# Altium PCB MB1364.PcbDoc (part 3 of 3)
Units mm, origin at the board's own origin, x right, y up, seen from the top; angles counter-clockwise.
Board outline 70 x 133.34 mm, 6 copper layers (Top Layer, Signal Layer 1, Signal Layer 2, Signal Layer 3, Signal Layer 4, Bottom Layer), stack 1.57 mm thick; 66 components, 167 nets, 440 pads, 46 vias.
Unrouted connection lines stored in the file: 1.
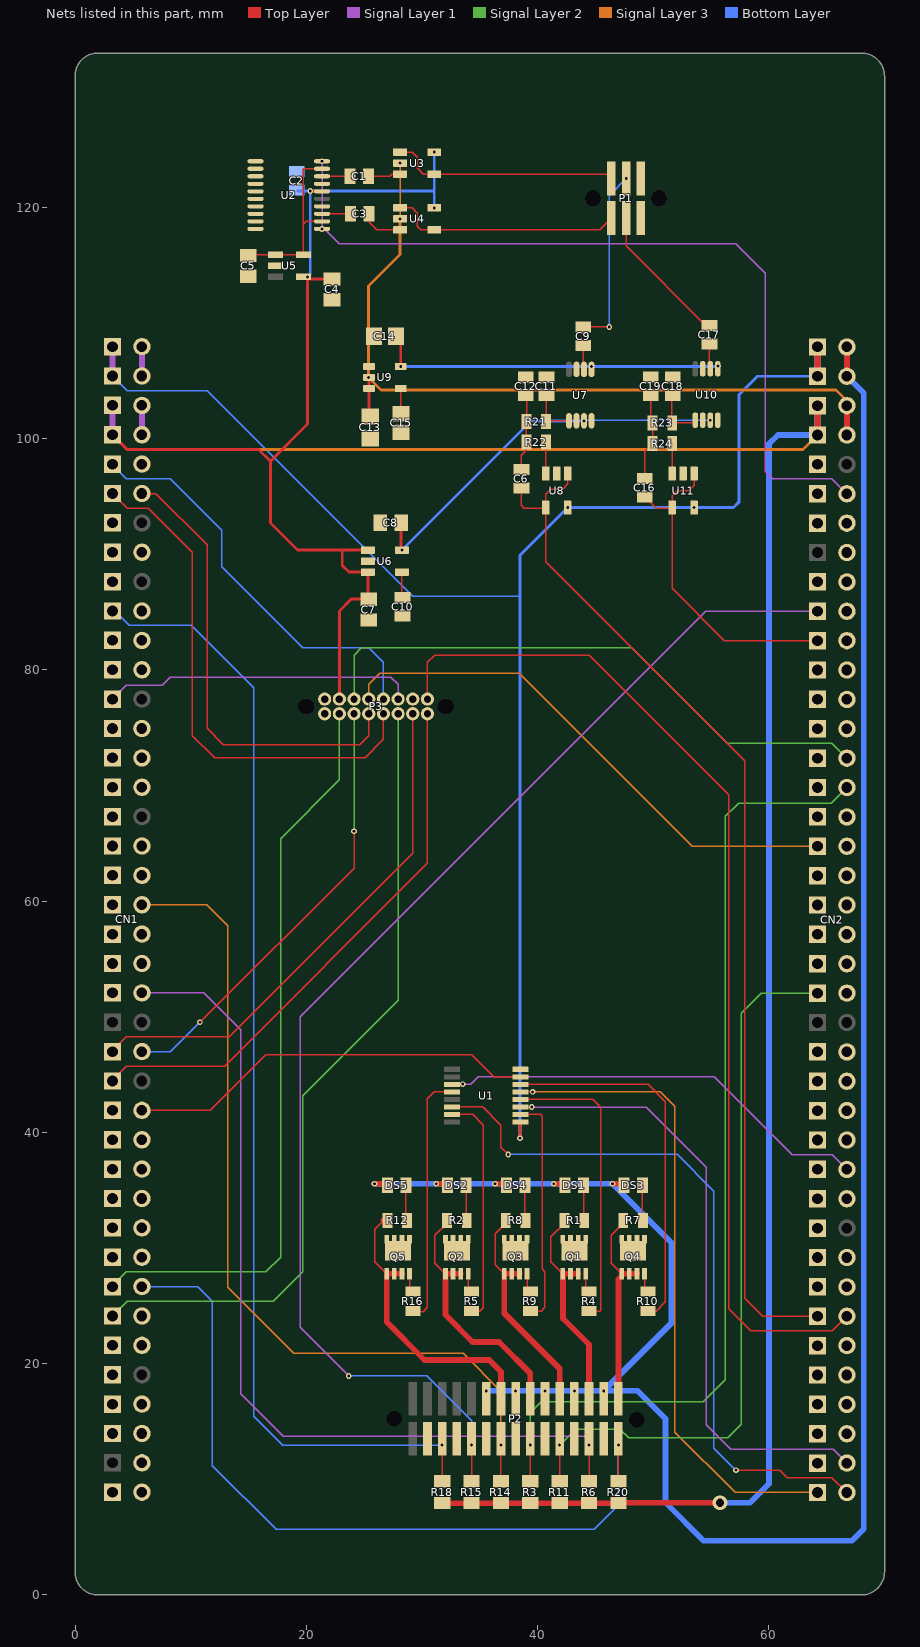
[diagram p6: the nets of this part, all layers, seen from the top]

## Part data (continued)
U6: library part CMP-0062-01907-3, "Micropower, 150mA Low-Noise Ultra Low-Dropout CMOS Voltage Regulator, 5-pin SOT-23, Pb-Free", Case/Package=SOT-23, Current Rating=150A, Dropout Voltage=60mV, Manufacturer="Texas Instruments", Max Input Voltage=6V, Max Operating Temperature=125°C, Max Output Current=150mA, Max Output Voltage=2.5V, Max Power Dissipation=250mW, Min Operating Temperature=-40°C, Output Voltage Accuracy=2%, PackageTopMarking=LCSB*XTT, PowerWise=N, Quiescent Current=150uA, Supplier Part Number 1=LP3985IM5-2.5/NOPBCT-ND, Accuracy=2%, ComponentLink1Description="Datasheet URL", ComponentLink1URL=http://www.ti.com/general/docs/lit/getliterature.tsp?genericPartNumber=LP3985&fileType=pdf, ComponentLink2Description=https://datasheet.ciiva.com/46441/10171-46441111.pdf?src-supplier=Element14, ComponentLink2URL=https://datasheet.ciiva.com/46441/10171-46441111.pdf?src-supplier=Element14, ComponentLink3Description=https://datasheet.ciiva.com/49047/1882660-49047100.pdf?src-supplier=Element14, ComponentLink3URL=https://datasheet.ciiva.com/49047/1882660-49047100.pdf?src-supplier=Element14, ComponentLink4Description=https://datasheet.ciiva.com/46383/1882660-46383391.pdf?src-supplier=Element14, ComponentLink4URL=https://datasheet.ciiva.com/46383/1882660-46383391.pdf?src-supplier=Element14, CompType="LDO IC", Contact Plating=Tin, Height=1.02mm, Lead Free="Lead Free", Length=2.92mm, Manufacturer Part Number=LP3985IM5-2.5/NOPB, Max Supply Voltage=6V, Min Input Voltage=2.5V, Min Supply Voltage=2.5V, Mount="Surface Mount", Nominal Output Voltage=2.5V, Number of Outputs=1, Number of Pins=5, Output Current=150mA, Output Type=Fixed, Output Voltage=2.5V, PackageDescription="Molded SOT-23, .115 x .063 x .040 in Body, 5 Lead, .0375 in Pitch", PackageReference=DBV0005A, Packaging="Tape and Reel", PinCount=5, Polarity=Positive, Power Dissipation=250mW, Pricing 1="1=0.66000, 10=0.57800, 100=0.44300, 500=0.35020 (USD)", REACH SVHC="No SVHC", RoHS=Y, Stock 1=16680, Supplier 1=Digi-Key, Termination=SMD/SMT, Width=1.6mm
U7 U10: "IC CONVERTER RMS-DC PREC 9MSOP"
U9: library part CMP-0394-00292-2, "Single Output High PSRR LDO, 200 mA, Fixed -2.5 V Output, -10 to -2.7 V Input, 5-pin SOT-23 (DBV), -40 to 125 degC, Green (RoHS & no Sb/Br)", Case/Package=SOT-23, Dropout Voltage=280mV, Input Bias Current=130uA, Manufacturer="Texas Instruments", Max Input Voltage=-2.7V, Max Operating Temperature=125°C, Max Output Current=200mA, Max Output Voltage=-2.5V, Max Power Dissipation=560mW, Min Current Limit=300mA, Min Input Voltage=-10V, Min Operating Temperature=-40°C, Output Voltage Accuracy=1%, Package Quantity=3000, Supplier Part Number 1=296-39479-1-ND, Accuracy=2%, Accuracy(%)=2, Code_JEDEC=MO-178, ComponentLink1Description="Manufacturer URL", ComponentLink1URL=http://www.ti.com/, ComponentLink2Description=Datasheet, ComponentLink2URL=http://www.ti.com/general/docs/lit/getliterature.tsp?genericPartNumber=TPS72325&fileType=pdf, ComponentLink3Description="Package Specification", ComponentLink3URL=http://www.ti.com/litv/pdf/mpds018i, ComponentLink4Description=http://www.mouser.com/ds/2/405/slvs346c-521947.pdf?src-supplier=Mouser, ComponentLink4URL=http://www.mouser.com/ds/2/405/slvs346c-521947.pdf?src-supplier=Mouser, ComponentLink5Description=http://components.arrow.com/part/dataview/0323_00141856?src-supplier=Arrow+Europe, ComponentLink5URL=http://components.arrow.com/part/dataview/0323_00141856?src-supplier=Arrow+Europe, ComponentLink6Description=http://www.ti.com/general/docs/lit/getliterature.tsp?genericPartNumber=TPS723&amp;&amp;fileType=pdf&src-supplier=Newark, ComponentLink6URL=http://www.ti.com/general/docs/lit/getliterature.tsp?genericPartNumber=TPS723&amp;&amp;fileType=pdf&src-supplier=Newark, ComponentLink7Description=http://focus.ti.com/lit/ds/symlink/tps72325.pdf?src-supplier=Avnet+Europe, ComponentLink7URL=http://focus.ti.com/lit/ds/symlink/tps72325.pdf?src-supplier=Avnet+Europe, ComponentLink8Description=http://www.ti.com/general/docs/lit/getliterature.tsp?genericPartNumber=TPS723&amp;&amp;fileType=pdf&src-supplier=Farnell, ComponentLink8URL=http://www.ti.com/general/docs/lit/getliterature.tsp?genericPartNumber=TPS723&amp;&amp;fileType=pdf&src-supplier=Farnell, ComponentLink9Description=http://www.ti.com/general/docs/lit/getliterature.tsp?genericPartNumber=TPS723&&fileType=pdf&src-supplier=Avnet+Asia, ComponentLink9URL=http://www.ti.com/general/docs/lit/getliterature.tsp?genericPartNumber=TPS723&&fileType=pdf&src-supplier=Avnet+Asia, ComponentLink10Description=http://www.ti.com/general/docs/lit/getliterature.tsp?genericPartNumber=TPS723&&fileType=pdf&src-supplier=Avnet, ComponentLink10URL=http://www.ti.com/general/docs/lit/getliterature.tsp?genericPartNumber=TPS723&&fileType=pdf&src-supplier=Avnet, ComponentLink11Description=http://components.arrow.com/part/dataview/40177093S9611537N7713?src-supplier=Arrow, ComponentLink11URL=http://components.arrow.com/part/dataview/40177093S9611537N7713?src-supplier=Arrow, ComponentLink12Description=http://www.ti.com/lit/ds/symlink/tps723.pdf?src-supplier=Digi-Key, ComponentLink12URL=http://www.ti.com/lit/ds/symlink/tps723.pdf?src-supplier=Digi-Key, ComponentLink13Description=http://www.ti.com/general/docs/lit/getliterature.tsp?genericPartNumber=TPS723&&fileType=pdf&src-supplier=Element14, ComponentLink13URL=http://www.ti.com/general/docs/lit/getliterature.tsp?genericPartNumber=TPS723&&fileType=pdf&src-supplier=Element14, ComponentLink14Description=http://www.ti.com/lit/ds/symlink/tps72301.pdf?src-supplier=Digi-Key, ComponentLink14URL=http://www.ti.com/lit/ds/symlink/tps72301.pdf?src-supplier=Digi-Key, Contact Plating=Tin, DatasheetVersion=SLVS346B, Eco-Plan="Green (RoHS & no Sb/Br)", Fixed Output Options(V)=-2.5, Iout(Max)(A)=0.2, Iq(Typ)(mA)=0.13, Lead Free="Lead Free", Manufacturer Part Number=TPS72325DBVR, Min Output Voltage=-2.5V, Mounting Technology="Surface Mount", Nominal Output Voltage=-2.5V, Number of Outputs=1, Number of Pins=5, Number of Regulators=1, Output Current=200mA, Output Type=Fixed, Output Voltage=-2.5V, PackageDescription="5-Pin Plastic Small Outline, Body 1.60 Ã— 2.90 mm, Pitch 0.95 mm", PackageReference=DBV0005A, PackageVersion=4073253-4/K, Packaging="Tape and Reel", PartNumber=TPS72325DBVR, Polarity=Negative, Power Dissipation=560mW, Pricing 1="1=2.81000, 10=2.52200, 100=2.02720, 500=1.66552, 1000=1.37999 (USD)", Quiescent Current=130uA, Radiation Hardening=No, REACH SVHC="No SVHC", RoHS=Yes, Stock 1=6951, SubFamily="Single Channel LDO", Supplier 1=Digi-Key, Vdo(Typ)(mV)=280, Vin(Max)(V)=-2.7, Vin(Min)(V)=-10, Vout Adj(Max)(V)=-2.5, Vout Adj(Min)(V)=-2.5

## Via types
v1: diameter 0.5, hole 0.25, Top Layer to Bottom Layer, 45 vias
v2: diameter 1.27, hole 0.711, Top Layer to Bottom Layer, 1 vias

## Nets (pads, with @x,y where several pads share a name; then routed paths per layer and width w, separated by ;. In a path a pad name is that pad's centre, name@x,y a point inside that pad or via, vN(x,y) a via of type N, cw(c..) or ccw(c..) an arc to the next point about the centre after c; other vN are vias at no path point)
3V3: CN1.24
3V3_VDD: CN1.13
5V_USB_STLK: CN2.16
"400mV Ref": C5.2 U2.12 U2.19 U5.1 U5.5 | length 15.6
  Top Layer w0.12: C5.2@14.986,115.835 15.036,115.885 U5.1@17.342,115.885 U5.5@19.742,115.885 19.742,118.548 ; U2.12@21.366,118.781 19.975,118.781 19.742,118.548 ; U2.19@21.366,123.331 19.742,123.331 19.742,118.548
+2.5: C8.2 U6.5 U7.7 U10.7 | length 33.6
  Top Layer w0.12: U6.5@28.205,90.425 v1(28.272,90.358)
  Top Layer w0.25: U6.5@28.205,90.425 C8.2@28.205,92.71
  Bottom Layer w0.12: v1@44.071,101.585 v1(54.935,101.585)
  Bottom Layer w0.25: v1(28.272,90.358) 39.441,101.527 v1(44.013,101.527)
+3.3: CN1.1 CN1.3 CN2.1 CN2.3 P3.3 U1.1 U8.5 U11.5 | length 142.8
  Top Layer w0.12: U1.1@38.481,40.876 U1.1@38.51,40.905
  Top Layer w0.25: v1(38.481,39.497) U1.1@38.481,40.876
  Top Layer w0.5: CN2.3@64.206,105.384 CN2.1@64.206,107.924
  Signal Layer 1 w0.5: CN1.3@3.246,105.409 CN1.1@3.246,107.949 ; CN2.3@64.206,105.384 CN2.1@64.206,107.924
  Bottom Layer w0.12: CN1.3@3.246,105.409 4.515,104.14 11.43,104.14 29.21,86.36 38.481,86.36 ; v1@53.288,94.029 53.408,94.149 v1(53.528,94.029)
  Bottom Layer w0.25: v1(38.481,39.497) 38.481,86.36 38.481,89.904 v1(42.606,94.029) v1@53.288,94.029 ; v1(53.528,94.029) 56.945,94.029 57.404,94.488 57.404,103.759 59.029,105.384 CN2.3@64.206,105.384
  Bottom Layer w0.5: CN2.3@64.206,105.384 CN2.1@64.206,107.924
+5: C2.2 C4.2 C7.2 CN1.5 CN1.7 CN2.5 CN2.7 P3.13 R3.2 R6.2 R11.1 R14.1 R15.2 R18.1 R20.1 U2.16 U3.5 U4.5 U5.4 U6.1 U6.3 | length 286.4
  Top Layer w0.12: v1(20.117,113.97) U5.4@20.284,113.803 ; U2.16@21.336,121.412 U2.16@21.366,121.381 ; C7.2@25.322,86.195 C7.2@25.4,86.117 ; R20.1@46.99,7.94 R20.1@47.026,7.976
  Top Layer w0.25: CN1.7@3.246,100.329 4.515,99.06 ; 15.875,99.06 16.892,98.043 ; v1(20.117,113.97) 20.117,101.268 16.892,98.043 ; U5.4@20.284,113.803 C4.2@22.225,113.803 ; P3.13@22.86,77.47 22.86,85.09 23.887,86.117 C7.2@25.4,86.117 ; C7.2@25.322,86.195 U6.3@25.322,88.458 23.683,88.458 23.114,89.027 23.114,90.358 ; U6.1@25.322,90.358 23.114,90.358 ; 16.892,98.043 16.892,92.709 19.243,90.358 23.114,90.358
  Top Layer w0.253: 4.515,99.06 15.875,99.06
  Top Layer w0.254: v1(20.341,121.412) U2.16@21.336,121.412
  Top Layer w0.5: R18.1@31.75,7.94 R15.2@34.29,7.94 R14.1@36.83,7.94 R3.2@39.37,7.94 R11.1@41.91,7.94 R6.2@44.45,7.94 R20.1@46.99,7.94 ; R20.1@47.026,7.976 v2(55.778,7.976) ; CN2.7@64.206,100.304 CN2.5@64.206,102.844
  Signal Layer 1 w0.5: CN1.7@3.246,100.329 CN1.5@3.246,102.869 ; CN2.7@64.206,100.304 CN2.5@64.206,102.844
  Signal Layer 3 w0.25: CN1.7@3.246,100.329 4.515,99.06 62.962,99.06 CN2.7@64.206,100.304
  Bottom Layer w0.12: C2.2@19.177,121.501 C2.2@19.266,121.412
  Bottom Layer w0.25: C2.2@19.266,121.412 v1(20.341,121.412) ; v1(20.117,113.97) 20.341,114.194 v1(20.341,121.412) ; v1(31.066,119.949) 31.066,121.412 ; v1(31.066,124.775) 31.066,121.412 ; v1(20.341,121.412) 31.066,121.412
  Bottom Layer w0.5: v2(55.778,7.976) 58.369,7.976 60.02,9.627 60.02,99.543 60.781,100.304 CN2.7@64.206,100.304 CN2.5@64.206,102.844
+5R: CN1.6 CN1.8 | length 2.5
  Signal Layer 1 w0.5: CN1.8@5.786,100.329 CN1.6@5.786,102.869
+12: CN2.2 CN2.4 DS1.1 DS2.1 DS3.1 DS4.1 DS5.1 P2.3 P2.7 P2.11 P2.15 P2.19 | length 195.4
  Top Layer w0.5: v1(25.908,35.56) DS5.1@26.886,35.56 ; v1(31.242,35.56) DS2.1@32.093,35.56 ; v1(36.322,35.56) DS4.1@37.173,35.56 ; v1(41.402,35.56) DS1.1@42.253,35.56 ; v1(46.482,35.56) DS3.1@47.333,35.56 ; CN2.4@66.746,105.384 CN2.2@66.746,107.924
  Bottom Layer w0.5: v1(25.908,35.56) v1(31.242,35.56) v1(36.322,35.56) v1(41.402,35.56) v1(46.482,35.56) 51.562,30.48 51.562,23.495 v1(45.72,17.653) ; v1(35.56,17.653) v1(38.1,17.653) v1(40.64,17.653) v1(43.18,17.653) v1(45.72,17.653) ; CN2.2@66.746,107.924 CN2.4@66.746,105.384 68.199,103.931 68.199,5.715 67.183,4.699 54.356,4.699 51.054,8.001 51.054,15.24 48.641,17.653 v1(45.72,17.653)
-2.5: C14.2 U7.1 U9.5 U10.1 | length 30.2
  Top Layer w0.12: C14.2@27.747,108.839 C14.2@28.172,108.414
  Top Layer w0.25: v1(28.172,106.233) C14.2@28.172,108.414
  Bottom Layer w0.12: v1@55.56,106.233 v1(55.601,106.274)
  Bottom Layer w0.25: v1(28.172,106.233) v1@44.638,106.233 ; v1(44.658,106.233) v1@55.56,106.233
-5: C13.2 CN2.6 CN2.8 U3.2 U4.2 U9.2 U9.3 | length 73.3
  Top Layer w0.12: C13.2@25.422,102.02 C13.2@25.527,101.915
  Top Layer w0.25: C13.2@25.422,102.02 U9.3@25.422,104.333 U9.2@25.422,105.283
  Top Layer w0.5: CN2.8@66.746,100.304 CN2.6@66.746,102.844
  Signal Layer 1 w0.5: CN2.8@66.746,100.304 CN2.6@66.746,102.844
  Signal Layer 3 w0.12: v1(28.116,118.999) v1(28.116,123.825) ; CN2.6@66.746,102.844 CN2.6@66.746,103.256
  Signal Layer 3 w0.25: v1(28.116,118.999) 28.116,115.924 25.375,113.182 v1(25.375,105.283) 26.467,104.191 65.811,104.191 CN2.6@66.746,103.256
  Bottom Layer w0.5: CN2.8@66.746,100.304 CN2.6@66.746,102.844
AGND: CN2.40
"Arrestment Heater FET": R9.1 U1.2 | length 20
  Top Layer w0.12: U1.2@38.51,41.555 40.233,41.555 40.386,41.402 40.386,28.194 40.64,27.94 40.64,24.892 40.298,24.55 R9.1@39.37,24.55
"Arrestment Htr Out": P2.9 Q3.1 Q3.2 Q3.3 R8.2 | length 19.4
  Top Layer w0.125: Q3.1@37.11,27.775 36.322,28.563 36.322,31.232 R8.2@37.25,32.16
  Top Layer w0.5: R8.2@37.25,32.16 R8.2@37.25,32.385 ; Q3.3@38.43,27.775 Q3.2@37.77,27.775 Q3.1@37.11,27.775 37.11,24.358 41.91,19.558 P2.9@41.91,16.954
"Arrestment Htr_LED": DS4.2 R8.1 | length 3
  Top Layer w0.12: R8.1@38.9,32.435 DS4.2@38.9,35.433
"Board1 Heater FET": R16.1 U1.12 | length 21.8
  Top Layer w0.12: R16.1@29.21,24.55 29.25,24.51 30.098,24.51 30.48,24.892 30.48,42.926 31.059,43.505 U1.12@32.61,43.505
"Board1 Htr Out": P2.17 Q5.1 Q5.2 Q5.3 R12.1 | length 25.2
  Top Layer w0.125: R12.1@26.685,32.4 25.908,31.623 25.908,28.817 Q5.1@26.95,27.775
  Top Layer w0.5: R12.1@26.685,32.4 R12.1@27.01,32.4 ; Q5.3@28.27,27.775 Q5.2@27.61,27.775 Q5.1@26.95,27.775 26.95,23.596 30.226,20.32 35.814,20.32 36.83,19.304 P2.17@36.83,16.954
"Board1_Htr LED": DS5.2 R12.2 | length 2.9
  Top Layer w0.12: R12.2@28.613,32.497 DS5.2@28.613,35.433
BOOT0: CN1.15
"Conning Tower Heater FET": R4.1 U1.4 | length 25.8
  Top Layer w0.12: U1.4@38.51,42.855 44.775,42.855 45.466,42.164 45.466,24.638 45.378,24.55 R4.1@44.45,24.55
"Conning Tower Htr Out": P2.5 Q1.1 Q1.2 Q1.3 R1.1 | length 18.6
  Top Layer w0.125: Q1.1@42.19,27.775 41.148,28.817 41.148,30.978 R1.1@42.33,32.16
  Top Layer w0.5: R1.1@42.33,32.16 R1.1@42.33,32.385 ; Q1.3@43.51,27.775 Q1.2@42.85,27.775 Q1.1@42.19,27.775 42.19,23.91 44.45,21.65 P2.5@44.45,16.954
"Conning Tower Htr_LED": DS1.2 R1.2 | length 3.1
  Top Layer w0.12: DS1.2@43.98,35.433 43.98,32.435 R1.2@44.03,32.385
Cross_Black: C9.1 P1.3 | length 15.7
  Top Layer w0.12: C9.1@43.942,109.632 43.962,109.652 v1(46.197,109.652)
  Bottom Layer w0.12: v1(46.197,109.652) 46.197,120.978 46.177,120.998 v1(47.67,122.491)
Cross_Blue: P1.5 U3.1 U3.4 | length 19.7
  Top Layer w0.12: U3.1@28.116,124.775 29.141,124.775 29.591,124.325 29.591,123.419 30.135,122.875 U3.4@31.066,122.875 45.996,122.875 P1.5@46.38,122.491
"Gearbox Heater FET": R10.1 U1.6 | length 32.3
  Top Layer w0.12: U1.6@38.51,44.155 49.571,44.155 51.054,42.672 51.054,25.359 50.245,24.55 R10.1@49.53,24.55
"Gearbox Htr Out": P2.1 Q4.1 Q4.2 Q4.3 R7.1 | length 17.7
  Top Layer w0.125: Q4.1@47.27,27.775 46.355,28.69 46.355,31.105 R7.1@47.41,32.16
  Top Layer w0.5: P2.1@46.99,16.954 46.99,27.297 47.27,27.577 Q4.1@47.27,27.775 Q4.2@47.93,27.775 Q4.3@48.59,27.775 ; R7.1@47.41,32.16 R7.1@47.41,32.385
"Gearbox Htr_LED": DS3.2 R7.2 | length 3
  Top Layer w0.12: R7.2@49.06,32.435 DS3.2@49.06,35.433
GND: C2.1 C4.1 C5.1 C7.1 C8.1 C10.1 C11.1 C12.1 C13.1 C14.1 C15.1 C18.1 C19.1 CN1.16 CN1.27 CN1.28 CN1.30 CN1.59 CN1.70 CN2.17 CN2.28 CN2.49 CN2.64 CN2.73 P1.1 P1.2 P2.4 P2.8 P2.12 P2.16 P2.20 P2.24 P2.28 P3.15 P3.16 Q1.5 Q1.6 Q1.7 Q1.8 Q1.9 Q2.5 Q2.6 Q2.7 Q2.8 Q2.9 Q3.5 Q3.6 Q3.7 Q3.8 Q3.9 Q4.5 Q4.6 Q4.7 Q4.8 Q4.9 Q5.5 Q5.6 Q5.7 Q5.8 Q5.9 U1.8 U2.1 U2.2 U2.3 U2.4 U2.5 U2.6 U2.7 U2.8 U2.9 U2.10 U2.14 U2.17 U5.2 U6.2 U7.3 U7.6 U7.8 U8.2 U9.1 U10.3 U10.6 U10.8 U11.2
IOREF: CN1.20
Long_Black: C17.1 P1.4 | length 12.5
  Top Layer w0.12: P1.4@47.65,119.063 47.65,116.662 54.547,109.766 C17.1@54.864,109.766
Long_Blue: P1.6 U4.1 U4.4 | length 20.2
  Top Layer w0.12: U4.1@28.116,119.949 29.141,119.949 29.591,119.499 29.591,118.339 29.881,118.049 U4.4@31.066,118.049 45.366,118.049 P1.6@46.38,119.063
"Meter Heater FET": R5.1 U1.15 | length 20
  Top Layer w0.12: U1.15@32.61,41.555 34.391,41.555 35.306,40.64 35.306,24.851 35.005,24.55 R5.1@34.29,24.55
Meter_Htr_LED: DS2.2 R2.1 | length 3.3
  Top Layer w0.12: R2.1@33.82,32.435 DS2.2@33.82,35.687
Meter_Htr_Out: P2.13 Q2.1 Q2.2 Q2.3 R2.2 | length 21.7
  Top Layer w0.125: Q2.1@32.03,27.775 31.115,28.69 31.115,31.105 R2.2@32.17,32.16
  Top Layer w0.5: Q2.1@32.03,27.53 32.03,24.231 34.376,21.885 36.662,21.885 39.37,19.177 P2.13@39.37,16.954 ; Q2.1@32.03,27.775 Q2.2@32.69,27.775 Q2.3@33.35,27.775 ; R2.2@32.17,32.16 R2.2@32.17,32.385
NetC1_1: C1.1 U2.18 | length 2.4
  Top Layer w0.12: U2.18@21.366,122.681 C1.1@23.762,122.682
NetC1_2: C1.2 U3.3 | length 2.8
  Top Layer w0.12: C1.2@25.362,122.682 27.203,122.682 27.396,122.875 U3.3@28.116,122.875
NetC3_1: C3.1 U2.13 | length 2.5
  Top Layer w0.12: U2.13@21.366,119.431 C3.1@23.838,119.431
NetC3_2: C3.2 U4.3 | length 3.7
  Top Layer w0.12: C3.2@25.438,119.431 25.438,118.707 26.096,118.049 U4.3@28.116,118.049
NetC6_2: C6.2 C12.2 R21.1 R22.2 | length 6.5
  Top Layer w0.12: C6.2@38.608,97.32 38.608,98.552 39.028,98.972 R22.2@39.028,99.688 R21.1@39.028,101.466 39.078,101.516 C12.2@39.078,103.671
NetC9_2: C9.2 U7.2 | length 2.1
  Top Layer w0.12: C9.2@43.942,108.032 43.942,106.048 U7.2@44.013,105.977
NetC10_2: C10.2 U6.4 | length 2.2
  Top Layer w0.12: U6.4@28.272,88.458 28.272,86.32 C10.2@28.321,86.271
NetC11_2: C11.2 R21.2 U7.5 | length 4.2
  Top Layer w0.12: R21.2@40.728,101.466 R21.2@40.767,101.505 ; C11.2@40.767,103.721 R21.2@40.767,101.505 ; U7.5@42.713,101.527 40.789,101.527 R21.2@40.767,101.505
NetC15_2: C15.2 U9.4 | length 2.2
  Top Layer w0.12: U9.4@28.172,104.333 28.172,102.168 C15.2@28.194,102.146
NetC16_2: C16.2 C19.2 R23.1 R24.2 | length 7.5
  Top Layer w0.12: C16.2@49.276,96.558 49.276,98.894 R24.2@49.95,99.568 R23.1@49.95,101.346 49.784,101.512 C19.2@49.784,103.721
NetC17_2: C17.2 U10.2 | length 2.3
  Top Layer w0.12: C17.2@54.864,108.166 54.864,105.928 U10.2@54.935,105.857
NetC18_2: C18.2 R23.2 U10.5 | length 4.4
  Top Layer w0.12: C18.2@51.6,103.721 51.6,101.396 R23.2@51.65,101.346 53.574,101.346 U10.5@53.635,101.407
NetQ1_4: Q1.4 R4.2 | length 1.6
  Top Layer w0.12: Q1.4@44.17,27.775 44.17,26.53 R4.2@44.45,26.25
NetQ2_4: Q2.4 R5.2 | length 1.2
  Top Layer w0.12: R5.2@34.01,26.53 Q2.4@34.01,27.775
NetQ3_4: Q3.4 R9.2 | length 1.6
  Top Layer w0.12: Q3.4@39.09,27.775 39.09,26.53 R9.2@39.37,26.25
NetQ4_4: Q4.4 R10.2 | length 1.2
  Top Layer w0.12: R10.2@49.25,26.53 Q4.4@49.25,27.775
NetQ5_4: Q5.4 R16.2 | length 1.2
  Top Layer w0.12: R16.2@28.93,26.53 Q5.4@28.93,27.775
NetR22_1: R22.1 U8.3 | length 2.6
  Top Layer w0.12: U8.3@40.706,97.099 40.728,97.121 R22.1@40.728,99.688
NetR24_1: R24.1 U11.3 | length 2.6
  Top Layer w0.12: U11.3@51.628,96.979 51.65,97.001 R24.1@51.65,99.568
NRST: CN1.22
PA0: CN1.36
PA1: CN1.38
PA2: CN2.43
PA3: CN2.45 P2.10 R11.2 | length 63.6
  Top Layer w0.12: R11.2@41.91,9.84 P2.10@41.91,13.525
  Signal Layer 2 w0.12: v1(41.91,12.954) 43.307,14.351 47.117,14.351 47.879,13.589 56.439,13.589 57.607,14.757 57.607,50.317 59.334,52.044 CN2.45@64.206,52.044
PA4: CN1.40 P2.18 R14.2 | length 75.1
  Top Layer w0.12: R14.2@36.83,9.84 P2.18@36.83,13.525
  Signal Layer 3 w0.12: CN1.40@5.786,59.689 11.38,59.689 13.208,57.861 13.208,26.619 18.923,20.904 33.553,20.904 36.83,17.628 v1(36.83,12.954)
PA5: CN2.19 P2.22 R15.1 | length 110.1
  Top Layer w0.12: R15.1@34.29,9.84 P2.22@34.29,13.525
  Signal Layer 1 w0.12: v1(23.673,18.948) 19.482,23.139 19.482,50.013 54.533,85.064 CN2.19@64.206,85.064
  Bottom Layer w0.12: v1(23.673,18.948) 30.404,18.948 34.29,15.062 v1(34.29,12.954)
PA6: C16.1 CN2.21 U11.1 U11.4 | length 28.5
  Top Layer w0.12: C16.1@49.276,94.958 50.254,93.98 51.579,93.98 U11.4@51.628,94.029 ; U11.1@53.528,96.979 53.528,95.954 53.078,95.504 52.078,95.504 51.628,95.054 U11.4@51.628,94.029 ; CN2.21@64.206,82.524 56.16,82.524 51.628,87.056 U11.4@51.628,94.029
PA7: CN2.23
PA8: CN2.31
PA9: CN2.29
PA10: CN2.41
PA11: CN2.22
PA12: CN2.20
PA13: CN1.21
PA14: CN1.23
PA15: CN1.25 P3.5 | length 27
  Signal Layer 1 w0.12: CN1.25@3.246,77.469 4.445,78.668 7.548,78.668 8.255,79.375 27.305,79.375 27.94,78.74 P3.5@27.94,77.47
PB0: CN1.42
PB1: CN2.32 P2.14 R3.1 | length 84.8
  Top Layer w0.12: R3.1@39.37,9.84 P2.14@39.37,13.525
  Signal Layer 2 w0.12: v1(39.37,12.954) 39.37,15.748 40.335,16.713 54.331,16.713 56.236,18.618 56.236,67.335 57.379,68.478 65.401,68.478 CN2.32@66.746,69.824
PB2: CN2.30 P3.11 | length 50.6
  Signal Layer 2 w0.12: P3.11@24.13,77.47 24.13,81.28 24.765,81.915 48.133,81.915 56.388,73.66 65.45,73.66 CN2.30@66.746,72.364
PB3: CN2.39
PB4: CN2.35 P3.9 | length 46.7
  Signal Layer 3 w0.12: P3.9@25.4,77.47 25.4,78.74 26.353,79.693 38.417,79.693 53.366,64.744 CN2.35@64.206,64.744
PB5: CN2.37
PB6: CN2.25
PB7: CN1.29
PB8: CN2.11
PB9: CN2.13
PB10: CN2.33
PB11: CN2.26
PB12: CN2.24
PB13: CN2.38
PB14: CN2.36
PB15: CN2.34
PC0: CN1.46 P2.6 R6.1 | length 77.2
  Top Layer w0.12: R6.1@44.45,9.84 P2.6@44.45,13.525
  Signal Layer 1 w0.12: CN1.46@5.786,52.069 11.126,52.069 14.326,48.87 14.326,17.399 18.009,13.716 44.069,13.716 44.45,13.335 v1(44.45,12.954)
PC1: CN1.44
PC2: CN1.43
PC3: CN1.45
PC4: CN2.42
PC5: CN2.14
PC6: CN2.12 U2.11 U2.20 | length 70.8
  Signal Layer 1 w0.12: v1(21.366,123.981) v1(21.366,118.131) 21.569,118.131 22.86,116.84 57.15,116.84 59.69,114.3 59.69,97.155 60.325,96.52 65.45,96.52 CN2.12@66.746,95.224
PC7: CN2.27
PC9: CN2.9
PC10: CN1.9 P3.7 | length 35.7
  Top Layer w0.12: CN1.9@3.246,97.719 CN1.9@3.246,97.789
  Bottom Layer w0.12: CN1.9@3.246,97.789 3.246,97.719 4.445,96.52 8.255,96.52 12.7,92.075 12.7,88.9 19.685,81.915 25.4,81.915 26.67,80.645 P3.7@26.67,77.47
PC11: CN1.10
PC12: CN1.11 P3.8 | length 45.1
  Top Layer w0.12: CN1.11@3.246,95.249 4.515,93.98 6.35,93.98 10.16,90.17 10.16,74.295 12.065,72.39 25.083,72.39 26.67,73.977 P3.8@26.67,76.2
PC13: CN1.31
PC14: CN1.33
PC15: CN1.35
PD0: CN1.67 P3.6 | length 69.7
  Signal Layer 2 w0.12: CN1.67@3.246,24.129 4.517,25.4 17.145,25.4 19.685,27.94 19.685,43.18 27.94,51.435 P3.6@27.94,76.2
PD1: CN1.65 P3.14 | length 64.7
  Signal Layer 2 w0.12: CN1.65@3.246,26.669 3.246,26.741 4.445,27.94 16.51,27.94 17.78,29.21 17.78,65.405 22.86,70.485 P3.14@22.86,76.2
PD2: CN1.12 P3.10 | length 40.1
  Top Layer w0.12: CN1.12@5.786,95.249 6.986,95.249 11.43,90.805 11.43,74.93 12.833,73.527 24.632,73.527 25.4,74.295 P3.10@25.4,76.2
PD3: CN1.50 P3.12 | length 38.3
  Top Layer w0.12: v1(10.795,49.53) 24.13,62.865 v1(24.13,66.04)
  Signal Layer 2 w0.12: v1(24.13,66.04) P3.12@24.13,76.2
  Bottom Layer w0.12: CN1.50@5.786,46.989 8.254,46.989 v1(10.795,49.53)
PD4: CN1.49 P3.4 | length 45.2
  Top Layer w0.12: CN1.49@3.246,46.989 3.246,47.061 4.445,48.26 13.335,48.26 29.21,64.135 P3.4@29.21,76.2
PD5: CN1.51 P3.2 | length 48
  Top Layer w0.12: CN1.51@3.246,44.449 3.246,44.521 4.445,45.72 12.929,45.72 30.48,63.271 P3.2@30.48,76.2
PD6: CN1.53
PD7: CN1.55
PD8: CN2.18
PD9: CN1.79
PD10: CN2.75
PD11: CN2.55
PD12: CN2.53
PD13: CN2.51
PD14: CN2.56
PD15: CN2.58 U1.11 | length 37.7
  Top Layer w0.12: U1.11@32.61,44.155 32.626,44.171 v1(33.528,44.171)
  Signal Layer 1 w0.12: v1(33.528,44.171) 34.214,44.171 34.848,44.805 55.271,44.805 62.027,38.049 65.501,38.049 CN2.58@66.746,36.804
PE0: CN2.74
PE1: CN1.71
PE2: CN1.56
PE3: CN1.57
PE4: CN1.58
PE5: CN1.60
PE7: CN2.54
PE8: CN2.50
PE10: CN2.57
PE11: CN2.66
PE12: CN2.59
PE13: CN2.65
PE14: CN2.61
PE15: CN2.63
PF0: CN1.63
PF1: CN1.61
PF2: CN1.62
PF3: CN2.68 P3.1 | length 90.5
  Top Layer w0.12: P3.1@30.48,77.47 30.48,80.645 31.115,81.28 44.45,81.28 56.515,69.215 56.515,24.765 58.42,22.86 65.502,22.86 CN2.68@66.746,24.104
PF4: CN2.46
PF5: CN2.44
PF6: CN1.17
PF7: CN1.19 P2.26 R18.2 | length 99
  Top Layer w0.12: R18.2@31.75,9.84 P2.26@31.75,13.525
  Bottom Layer w0.12: CN1.19@3.246,85.089 3.456,85.089 4.699,83.845 10.058,83.845 15.469,78.435 15.469,15.469 17.983,12.954 v1(31.75,12.954)
PF8: CN1.64
PF9: CN1.66 P2.2 R20.2 | length 68
  Top Layer w0.12: R20.2@46.99,9.84 P2.2@46.99,13.525
  Bottom Layer w0.12: CN1.66@5.786,26.669 10.618,26.669 11.887,25.4 11.887,11.176 17.399,5.664 44.882,5.664 46.99,7.772 v1(46.99,12.954)
PF10: CN2.52
PF11: CN2.72
PF12: CN2.69
PF13: C6.1 CN2.67 U8.1 U8.4 | length 90.6
  Top Layer w0.12: C6.1@38.608,95.72 38.608,94.234 38.862,93.98 40.537,93.98 U8.4@40.706,94.149 ; U8.1@42.606,97.099 42.606,96.074 42.156,95.624 41.156,95.624 40.706,95.174 U8.4@40.706,94.149 ; CN2.67@64.206,24.104 59.462,24.104 57.912,25.654 57.912,72.136 40.706,89.342 U8.4@40.706,94.149
PF14: CN2.60
PF15: CN2.70
PG0: CN1.69
PG1: CN1.68
PG3: CN1.54 U1.7 | length 35.5
  Top Layer w0.12: CN1.54@5.786,41.909 11.683,41.909 16.51,46.736 34.29,46.736 36.221,44.805 U1.7@38.51,44.805
PG4: CN2.79 U1.5 | length 56.6
  Top Layer w0.12: U1.5@38.51,43.505 38.515,43.51 v1(39.573,43.51)
  Signal Layer 3 w0.12: v1(39.573,43.51) 50.622,43.51 51.867,42.266 51.867,14.072 57.075,8.864 CN2.79@64.206,8.864
PG5: CN2.78 U1.3 | length 54.1
  Top Layer w0.12: U1.3@38.51,42.205 38.526,42.189 v1(39.497,42.189)
  Signal Layer 1 w0.12: v1(39.497,42.189) 49.403,42.189 54.585,37.008 54.585,14.732 56.693,12.624 65.557,12.624 66.746,11.435 CN2.78@66.746,11.404
PG6: CN2.80 U1.14 | length 62.1
  Top Layer w0.12: U1.14@32.61,42.205 35.265,42.205 36.83,40.64 36.83,38.735 v1(37.465,38.1) ; v1(57.15,10.795) 60.96,10.795 61.595,10.16 65.45,10.16 CN2.80@66.746,8.864
  Bottom Layer w0.12: v1(37.465,38.1) 52.07,38.1 55.245,34.925 55.245,12.7 v1(57.15,10.795)
PG7: CN2.77
PG8: CN2.76
PG9: CN1.73
PG10: CN1.76
PG11: CN1.80
PG12: CN1.75
PG13: CN1.78
PG14: CN2.71
PG15: CN1.74
PH0: CN1.37
PH1: CN1.39
VBAT: CN1.41
VIN: CN1.32
ZSupply: CN1.2 CN1.4 | length 2.5
  Signal Layer 1 w0.5: CN1.4@5.786,105.409 CN1.2@5.786,107.949
pads on no net: CN1.14 CN1.18 CN1.26 CN1.34 CN1.47 CN1.48 CN1.52 CN1.72 CN1.77 CN2.10 CN2.15 CN2.47 CN2.48 CN2.62 P1.MH1 P1.MH2 P2.21 P2.23 P2.25 P2.27 P2.29 P2.30 P2.31 P2.32 P3.MH1 P3.MH2 U1.9 U1.10 U1.13 U1.16 U2.15 U5.3 U7.4 U10.4

## Polygon pours and split planes (outlines as drawn)
GND on Top Layer "GND_L01_P114" (solid, remove dead copper, pour order 114): 1.574,133.34 0.112,131.879 0.112,107.629 0.112,1.629 1.612,0.129 37.549,0.129 37.537,0.12 68.233,0 69.862,1.629 69.862,106.879 67.862,106.879 69.862,106.879 69.862,131.879 68.401,133.34
GND on Signal Layer 1 "GND_L02_P020" (solid, remove dead copper, pour order 20): 35.266,0 53.666,0 69.037,0 69.416,0.379 70,0.963 70,132.345 69.005,133.34 68,133.34 -0.034,133.379 -0.034,0.929 0.895,0
GND on Bottom Layer "GND_L06_P050" (solid, remove dead copper, pour order 50): 35.369,0.079 53.541,0.079 53.541,0.054 53.591,0.079 68.541,0.079 69.866,1.404 69.866,131.829 68.466,133.229 1.791,133.254 1.516,133.254 0.041,131.779 0.041,1.629 1.591,0.079

## Other copper
Top Layer:
  text "1" at 68.13,117.165 h1 r90
Signal Layer 1:
  text "2" at 68.13,118.415 h1 r90
Signal Layer 2:
  text "3" at 68.13,119.915 h1 r90
Signal Layer 3:
  text "4" at 68.13,122.165 h1 r90
Signal Layer 4:
  text "5" at 68.13,123.665 h1 r90
Bottom Layer:
  text "6" at 68.13,125.165 h1 r90
Multi-Layer:
  pour cut-out: 66.512,116.931 68.512,116.931 68.512,125.431 66.512,125.431

## Silkscreen, mask and mechanical layers (free items; w line width, h text height)
Top Overlay:
  circle w0.1: c33.532,58.705 r4.663
  circle w0.254: c33.532,58.705 r5
  lines w0.127: 32.008,61.067 32.77,60.305 33.532,60.813 32.516,59.543 34.04,60.305 33.024,59.035 34.548,59.797 33.532,58.527 35.056,59.289 34.04,58.019 35.564,58.781 35.056,58.019 35.818,57.257
  lines w0.254: 31.5,61.194 32.516,61.194 ; 32.008,61.067 32.008,57.257 35.818,57.257 ; 35.945,56.749 35.945,57.765
  text "ZSupply" at 6.538,107.48 h1
  text "+3.3" at 59.969,107.29 h1
  text "+12" at 67.615,106.883 h1 r45
  text "+3.3" at 0.752,106.525 h1 r45
  text "+3.3" at 59.842,105.08 h1
  text "ZSupply" at 6.538,104.94 h1
  text "+12" at 67.742,104.394 h1 r45
  text "+3.3" at 0.752,103.731 h1 r45
  text "+5" at 60.188,102.512 h1
  text "+5R" at 6.848,102.207 h1
  text "-5" at 68.123,102.006 h1 r45
  text "+5" at 1.26,101.953 h1 r45
  text "+5" at 60.188,99.718 h1
  text "+5R" at 6.848,99.667 h1
  text "-5" at 67.818,99.466 h1 r45
  text "+5" at 1.26,99.413 h1 r45
  text "Heaters/ Levels/ Motor" at 28.118,69.774 h1
  text "ZLS Corp" at 27.94,67.818 h1
  text "REV A" at 27.94,65.913 h1
  text "ZLS" at 32.516,55.657 h1
Bottom Overlay:
  text "CN12" at 67.183,109.982 h1.5
  text "PC6" at 69.85,99.06 h1 r45
  text "PC10" at 1.905,97.155 h1 r315
  text "PC11" at 9.525,97.155 h1
  text "PC9" at 62.89,97.028 h1
  text "PC5" at 69.85,96.52 h1 r45
  text "PC12" at 1.905,94.615 h1 r315
  text "PD2" at 9.525,94.615 h1
  text "PB8" at 62.865,94.615 h1
  text "PC8" at 76.2,93.98 h1 r45
  text "U5V" at 69.85,93.345 h1 r45
  text "3V3" at 1.905,92.075 h1 r315
  text "VDD" at 9.525,92.075 h1
  text "PB9" at 62.865,92.075 h1
  text "BT0" at 1.905,89.535 h1 r315
  text "GND" at 9.525,89.535 h1
  text "VREF+" at 62.23,89.535 h1
  text "PD8" at 69.85,88.9 h1 r45
  text "PF6" at 1.905,86.995 h1 r315
  text "NC" at 8.89,86.995 h1
  text "5V_USB_STLK" at 53.34,86.995 h1
  text "GND" at 62.23,86.995 h1
  text "PA12" at 70.485,86.995 h1 r45
  text "PF7" at 1.905,84.455 h1 r315
  text "+3V3" at 11.43,84.455 h1
  text "PA5" at 62.23,84.455 h1
  text "PA11" at 69.85,83.82 h1 r45
  text "E5V" at -3.175,82.55 h1
  text "NRST" at 10.795,81.915 h1
  text "PA6" at 62.23,81.915 h1
  text "PA13" at 2.103,81.507 h1 r315
  text "PB12" at 69.85,81.28 h1 r45
  text "PA7" at 61.895,79.602 h1
  text "3V3" at 9.469,79.348 h1
  text "PA14" at 2.103,78.942 h1 r315
  text "PB11" at 69.85,78.74 h1 r45
  text "PB6" at 61.895,77.062 h1
  text "+5V" at 9.469,76.758 h1
  text "PA15" at 2.103,76.453 h1 r315
  text "GND" at 69.85,76.2 h1 r45
  text "GND" at 1.697,74.649 h1 r315
  text "PC7" at 61.895,74.522 h1
  text "GND" at 9.469,74.294 h1
  text "PB2" at 69.845,73.862 h1 r45
  text "PB7" at 1.697,72.109 h1 r315
  text "PA9" at 61.895,71.982 h1
  text "GND" at 9.469,71.754 h1
  text "PB1" at 69.692,71.144 h1 r45
  text "PA8" at 61.895,69.442 h1
  text "PC13" at 1.905,69.215 h1 r315
  text "VIN" at 9.525,69.215 h1
  text "PB15" at 69.794,68.452 h1 r45
  text "PB10" at 61.895,66.902 h1
  text "PC14" at 1.905,66.675 h1 r315
  text "NC" at 8.89,66.675 h1
  text "PB14" at 69.845,65.836 h1 r45
  text "PB4" at 61.895,64.362 h1
  text "PA0" at 9.469,64.159 h1
  text "PC15" at 1.905,64.135 h1 r315
  text "PB13" at 70.485,63.5 h1 r45
  text "PB5" at 61.895,61.822 h1
  text "OSCI" at 1.905,61.595 h1 r315
  text "PA1" at 9.164,61.568 h1
  text "AGND" at 70.485,60.325 h1 r45
  text "PB3" at 61.895,59.282 h1
  text "PA4" at 9.469,59.13 h1
  text "OSCO" at 1.905,59.055 h1 r315
  text "PC4" at 69.85,57.15 h1 r45
  text "VBAT" at 2.103,56.768 h1 r315
  text "PA10" at 61.895,56.742 h1
  text "PB0" at 9.469,56.488 h1
  text "PC2" at 1.697,54.685 h1 r315
  text "PA2" at 61.895,54.202 h1
  text "PC1" at 9.525,53.975 h1
  text "NC" at 69.215,53.975 h1
  text "PC3" at 1.697,52.094 h1 r315
  text "PA3" at 61.895,51.662 h1
  text "PC0" at 9.525,51.435 h1
  text "NC" at 69.215,51.435 h1
  text "PE8" at 69.85,50.165 h1 r45
  text "PF10" at 70.485,48.26 h1 r45
  text "GND" at 61.895,47.217 h1
  text "PD4" at 1.905,46.99 h1 r315
  text "PD3" at 9.469,46.278 h1
  text "PE7" at 69.85,45.085 h1 r45
  text "PD13" at 61.895,44.677 h1
  text "PD5" at 1.595,44.169 h1 r315
  text "NC" at 8.872,43.902 h1
  text "PD14" at 69.85,43.18 h1 r45
  text "PD12" at 61.895,42.137 h1
  text "PD6" at 1.595,41.655 h1 r315
  text "NC" at 8.897,41.427 h1
  text "PD15" at 69.85,40.64 h1 r45
  text "PD11" at 61.895,39.597 h1
  text "PD7" at 1.544,39.191 h1 r315
  text "PE2" at 9.469,38.683 h1
  text "PF14" at 70.485,38.1 h1 r45
  text "PE10" at 61.895,37.057 h1
  text "PE3" at 1.57,36.6 h1 r315
  text "PE4" at 9.469,36.27 h1
  text "PE12" at 61.895,34.517 h1
  text "GND" at 1.62,34.162 h1 r315
  text "PE5" at 9.469,33.451 h1
  text "PE9" at 69.87,33.095 h1 r45
  text "PE14" at 61.895,31.977 h1
  text "NC" at 1.991,31.785 h1
  text "NC" at 8.947,31.202 h1
  text "GND" at 69.87,30.58 h1 r45
  text "PE15" at 61.895,29.437 h1
  text "NC" at 2.041,29.235 h1
  text "PF8" at 9.469,28.523 h1
  text "PE11" at 69.997,28.117 h1 r45
  text "PE13" at 61.895,26.897 h1
  text "PD1" at 1.697,26.44 h1 r315
  text "PF9" at 9.469,25.983 h1
  text "NC" at 61.874,23.958 h1
  text "PD0" at 1.697,23.849 h1 r315
  text "NC" at 8.972,23.652 h1
  text "NC" at 69.215,23.495 h1
  text "PF15" at 70.485,23.495 h1 r45
  text "NC" at 1.941,21.61 h1
  text "NC" at 61.924,21.383 h1
  text "GND" at 9.572,21.027 h1
  text "PF11" at 69.845,20.243 h1 r45
  text "PE1" at 1.62,18.744 h1 r315
  text "PG14" at 61.895,18.642 h1
  text "PE6" at 9.469,18.338 h1
  text "PE0" at 69.87,18.007 h1 r45
  text "PG9" at 1.646,16.153 h1 r315
  text "GND" at 61.895,16.102 h1
  text "PG15" at 10.106,15.998 h1
  text "PG8" at 69.819,15.366 h1 r45
  text "PD10" at 61.895,13.562 h1
  text "PG10" at 10.21,13.41 h1
  text "PG12" at 2.103,12.927 h1 r315
  text "PG5" at 69.819,12.641 h1 r45
  text "NC" at 2.041,11.41 h1
  text "PG7" at 61.908,11.304 h1
  text "PG13" at 10.21,10.845 h1
  text "PG6" at 69.946,10.514 h1 r45
  text "PG4" at 61.774,8.658 h1
  text "PD9" at 1.697,8.533 h1 r315
  text "PG11" at 10.21,8.432 h1
Top Solder:
  region: 68.512,116.931 68.512,125.431 66.512,125.431 66.512,116.931
Bottom Solder:
  region: 68.512,116.931 68.512,125.431 66.512,125.431 66.512,116.931

## Dimensions
2,0 to 3.81,133.35 on M2-Board Dimensions
0,131.34 to 70,131.34 on M2-Board Dimensions

## Text inside footprints (layer, text, board x,y; h text height)
P1: Top Overlay "1" at 53.029,123.127 h1.97 r180; Top Overlay "2" at 53.029,119.697 h1.97 r180; Top Overlay "5" at 43.301,123.127 h1.97 r180; Top Overlay "6" at 43.301,119.697 h1.97 r180; Mechanical 40 "3.429" at 56.248,120.904 h0.39 r180; Mechanical 40 "5.715" at 58.026,120.904 h0.39 r180; Mechanical 40 "1.714" at 53.898,124.905 h0.39 r180; Mechanical 40 "1.587" at 52.755,126.365 h0.39 r180; Mechanical 40 "1.270" at 51.549,116.205 h0.39 r180; Mechanical 40 "2.540" at 51.549,115.189 h0.39 r180; Mechanical 40 "6.985" at 48.31,127.825 h0.39 r180; Mechanical 40 "5.715" at 48.31,125.285 h0.39 r180; M16-Top Courtyard "1" at 53.029,123.127 h1.97 r180; M16-Top Courtyard "2" at 53.029,119.697 h1.97 r180; M16-Top Courtyard "5" at 43.301,123.127 h1.97 r180; M16-Top Courtyard "6" at 43.301,119.697 h1.97 r180
P3: Top Overlay "16" at 18.511,76.657 h1.97 r180; Top Overlay "15" at 18.511,78.283 h1.97 r180; Top Overlay "2" at 34.589,76.657 h1.97 r180; Top Overlay "1" at 34.589,78.283 h1.97 r180; Mechanical 40 "8.890" at 26.695,71.565 h0.39 r180; Mechanical 40 "12.065" at 26.835,81.343 h0.39 r180; Mechanical 40 "13.335" at 26.835,83.883 h0.39 r180; Mechanical 40 "1.587" at 34.315,73.851 h0.39 r180; Mechanical 40 "1.270" at 33.109,72.581 h0.39 r180; Mechanical 40 "1.270" at 37.808,76.962 h0.39 r180; Mechanical 40 "0.635" at 35.458,80.455 h0.39 r180; Mechanical 40 "5.715" at 39.586,76.962 h0.39 r180; M16-Top Courtyard "16" at 18.511,76.657 h1.97 r180; M16-Top Courtyard "15" at 18.511,78.283 h1.97 r180; M16-Top Courtyard "2" at 34.589,76.657 h1.97 r180; M16-Top Courtyard "1" at 34.589,78.283 h1.97 r180